# EAGLE board Programmer v0.2 (EAGLE 7.7.0)
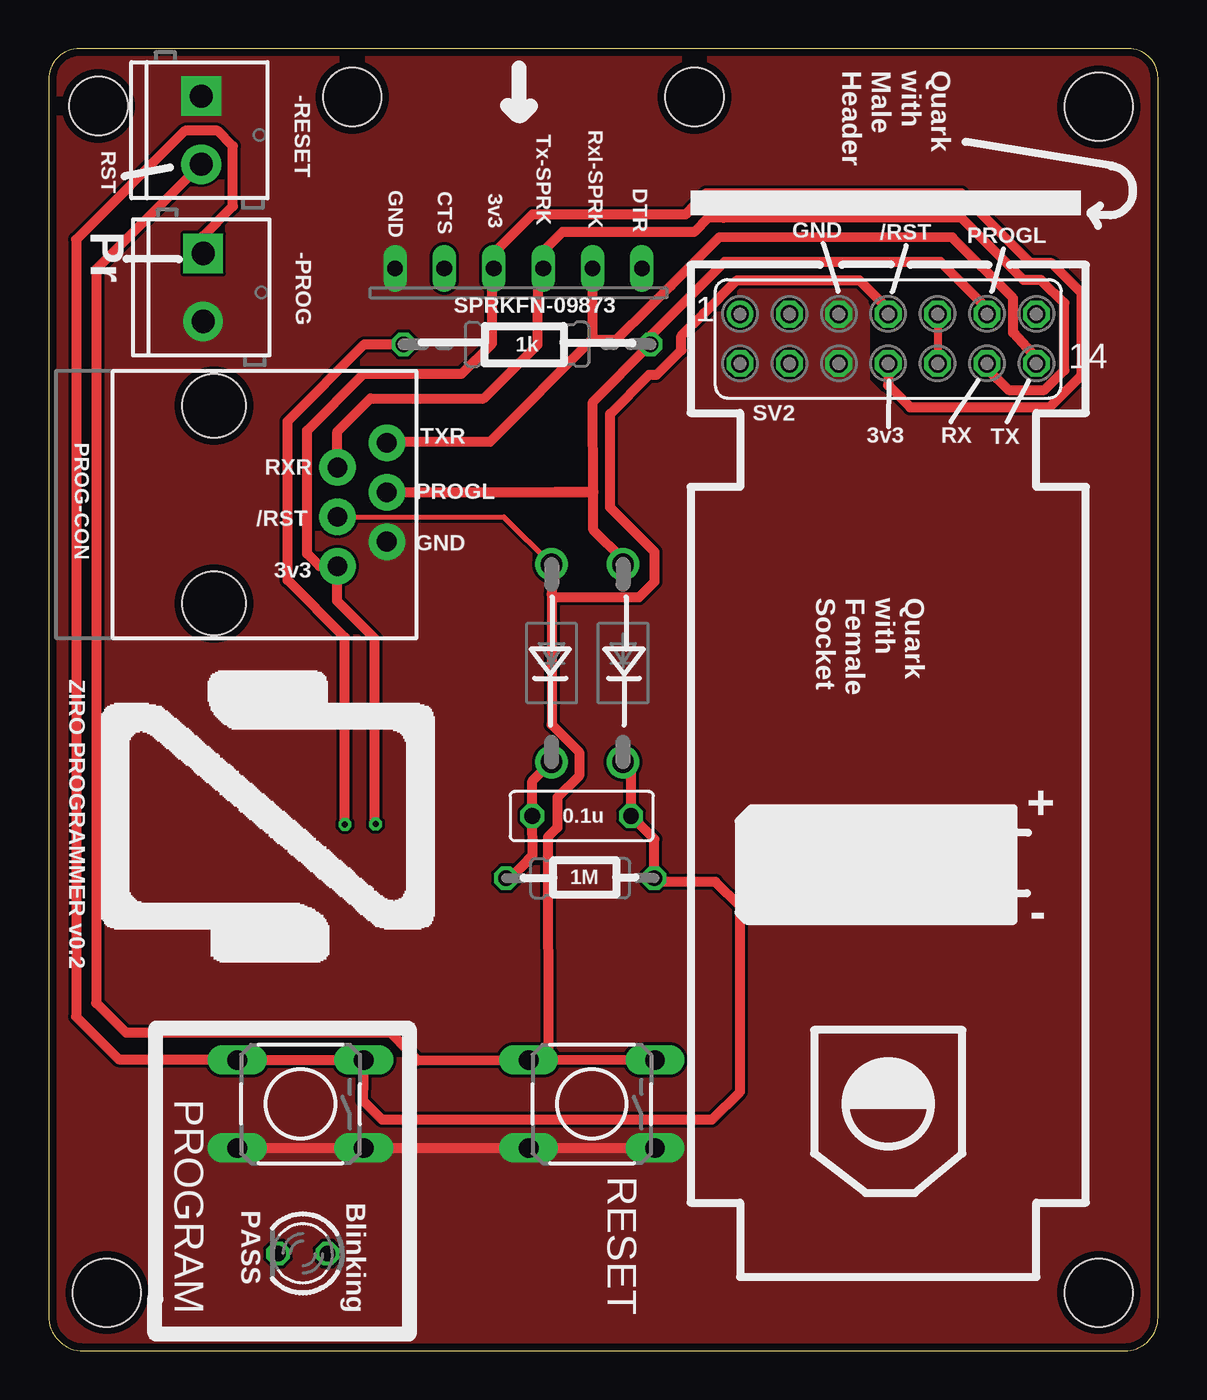
[diagram p0: board, top side]
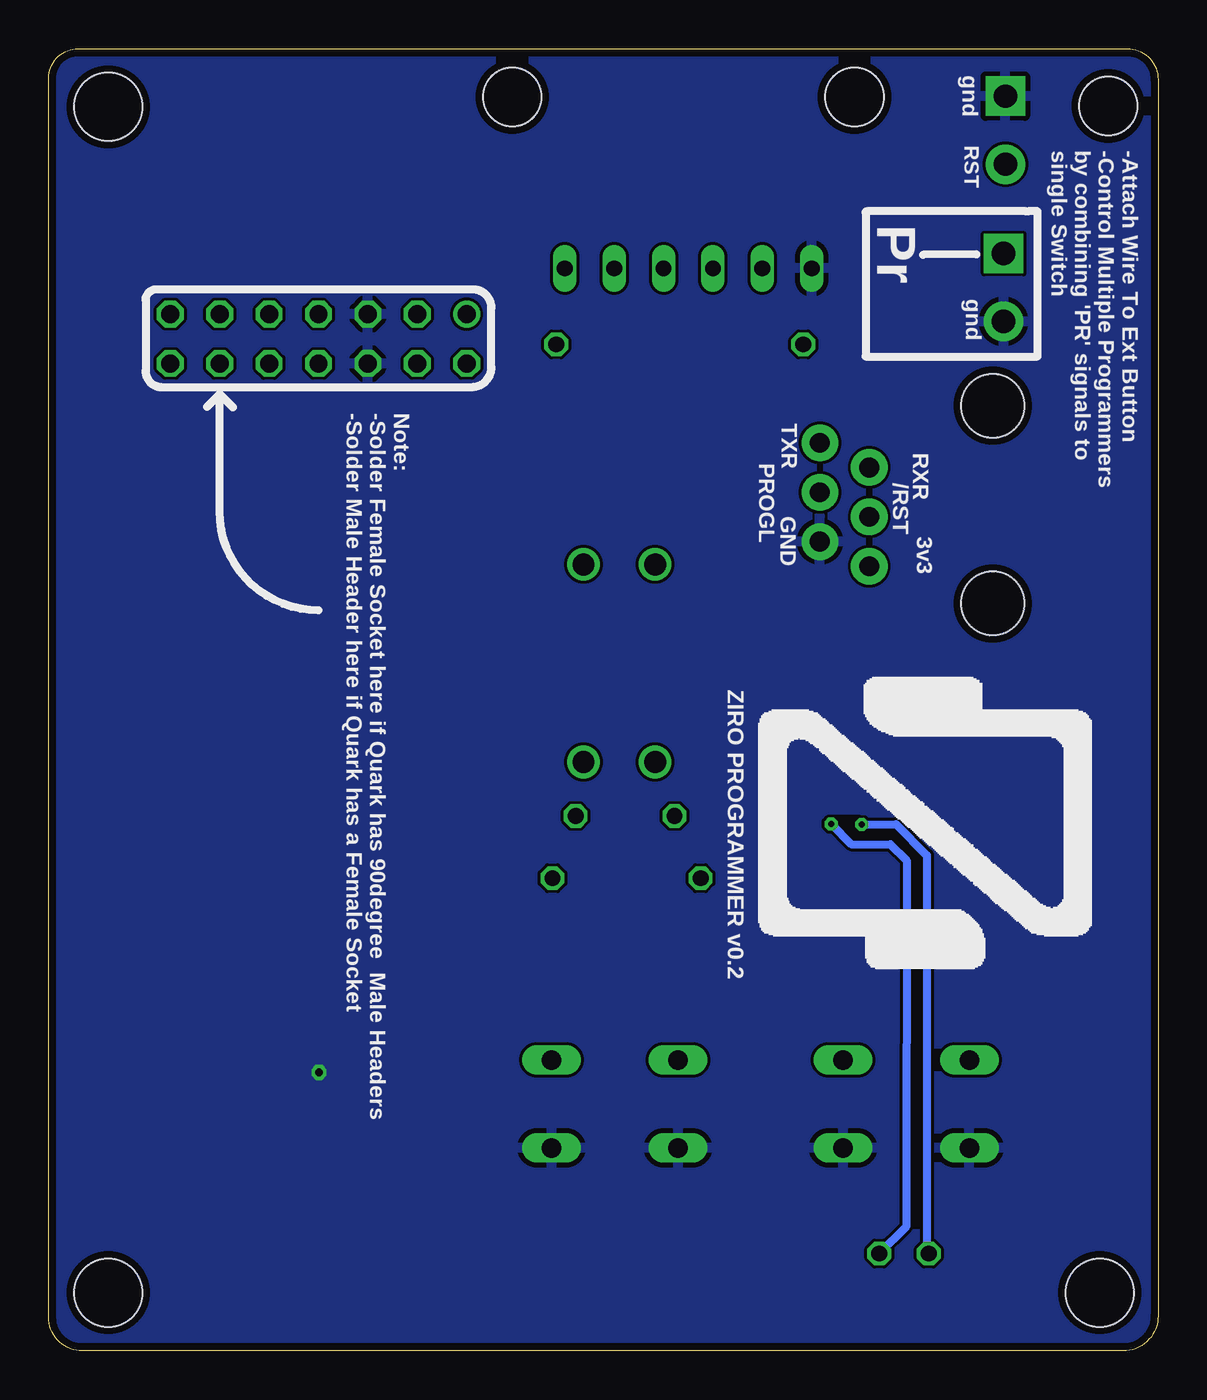
[diagram p1: board, bottom side, seen from below]

Size 57.06 x 67 mm. Coordinates in mm from the lower left corner, seen from the top.
Outline: 55.54,67 1.59,67 arc90 0,65.41 0,1.8 arc90 1.8,0 55.33,0 arc90 57.06,1.73 57.06,65.48 arc90 55.54,67
Copper layers (1*16): Top 0.0356mm / dielectric 1.5011mm / Bottom 0.0356mm
Design rules "oshpark-2layer-via-buried": minimum track width 6mil, minimum drill 10mil, track to track 6mil, track to pad 6mil, pad to pad 6mil, via to via 6mil, smd to smd 6mil, copper to edge 15mil, drill to drill 6mil, minimum pad ring 7mil, minimum via ring 7mil, stop-mask expansion 2.5mil, vias tented up to drill 16mil, thermal gap 10mil
Holes 3.5 mm at 54,3 54,64 3,3
Holes 3 mm at 15.62,64.51 33.22,64.51 2.56,64.05
tRestrict: 3 lines
bRestrict: 1 lines

## Footprints (pad centres in the part's own frame; a part is rotated, then mirrored left to right if it is on the bottom)
SCREWTERMINAL-3.5MM-2 = drill 1.2 pad 2.032 square: 1 0,0 | drill 1.2 pad 2.032: 2 3.5,0
C050-025X075 = drill 0.813 octagon: 1 -2.54,0; 2 2.54,0
DO41-10 = drill 1.118: A 5.08,0; C -5.08,0
LED3MM = drill 0.813 octagon: A -1.27,0; K 1.27,0
RJ11-6 = drill 1.016 pad 1.88: 1 -3.175,8.89; 2 -1.905,6.35; 3 -0.635,8.89; 4 0.635,6.35; 5 1.905,8.89; 6 3.175,6.35 | hole 3.251: -5.08,0; 5.08,0
TAC-SWITCH-PTH = drill 1.016 pad 1.524 long: 1 -3.251,2.261; 2 3.251,2.261; 3 -3.251,-2.261; 4 3.251,-2.261
0207/12 = drill 0.813 octagon: 1 -6.35,0; 2 6.35,0
0204/7 = drill 0.813 octagon: 1 -3.81,0; 2 3.81,0
FE06W = drill 0.813 long: 1 -6.35,0; 2 -3.81,0; 3 -1.27,0; 4 1.27,0; 5 3.81,0; 6 6.35,0
FE07-2 = drill 0.914: 1 -7.62,1.27 | drill 0.914 octagon: 2 -7.62,-1.27; 3 -5.08,1.27; 4 -5.08,-1.27; 5 -2.54,1.27; 6 -2.54,-1.27; 7 0,1.27; 8 0,-1.27; 9 2.54,1.27; 10 2.54,-1.27; 11 5.08,1.27; 12 5.08,-1.27; 13 7.62,1.27; 14 7.62,-1.27

## Placement (x,y rotation side)
-PROG  [SCREWTERMINAL-3.5MM-2]  7.95,56.46 270 top
-RESET  [SCREWTERMINAL-3.5MM-2]  7.85,64.55 270 top
C1  0.1uF  [C050-025X075]  27.42,27.52 0 top
D1  1N4004  [DO41-10]  25.87,35.38 90 top
D2  1N4004  [DO41-10]  29.55,35.38 90 top
LED1  TLLG4400  [LED3MM]  13.07,5.01 180 top
PROG-CON  RJ11  [RJ11-6]  8.51,43.54 270 top
PROGRAM  [TAC-SWITCH-PTH]  12.95,12.7 180 top
R1  1k  [0207/12]  24.6,51.78 180 top
R2  1M  [0204/7]  27.34,24.32 0 top
RESET  [TAC-SWITCH-PTH]  27.94,12.7 180 top
SPRKFN-09873  [FE06W]  24.16,55.69 180 top
SV2  [FE07-2]  43.18,52.07 0 top

## Library data of the parts
-PROG -RESET = SparkFun-Connectors; PROD_ID: CONN-08399
C1 R1 = rcl
D1 D2 = diode
LED1 = led; MF: VISHAY SEMICONDUCTOR; OC_FARNELL: 1612435
PROG-CON = SparkFun-Connectors; PROD_ID: CONN-08590
PROGRAM RESET = GeekAmmo
R2 = eagle-ltspice; SPICEMODEL: NONE; SPICEPREFIX: R
SPRKFN-09873 SV2 = con-lsta; OC_FARNELL: unknown; OC_NEWARK: unknown

## Nets
3.3V: LED1.A PROG-CON.6 SPRKFN-09873.4 SV2.8
/RST: -RESET.2 D1.A PROG-CON.4 RESET.3 RESET.4 SV2.7
CTS: SPRKFN-09873.5
DTR: SPRKFN-09873.1
GND: -PROG.2 -RESET.1 PROG-CON.5 PROGRAM.1 PROGRAM.2 RESET.1 RESET.2 SPRKFN-09873.6 SV2.5 SV2.6
GPIO0: D2.A PROG-CON.3 R1.1 SV2.11
N$2: LED1.K R1.2
N$7: C1.1 D1.C R2.1
PROG: -PROG.1 C1.2 D2.C PROGRAM.3 PROGRAM.4 R2.2
RXR: PROG-CON.2 SPRKFN-09873.3 SV2.12
TXR: PROG-CON.1 SPRKFN-09873.2 SV2.14
VDD: SV2.9 SV2.10

## Tracks (layer width: path | path; a pad name or v marks a point on that pad's centre or on a via)
3.3V  (via drill 0.3)
  Top 0.406: v16.82,27.1 16.82,27.23 16.76,27.23
  Top 0.508: SV2.8 43.18,49.68 44.31,48.55 51.48,48.55 53.13,50.2 53.12,54.43 51.59,55.96 50.52,55.96 46.94,59.54 33.8,59.54 32.76,58.46 24.88,58.46 22.89,56.47 SPRKFN-09873.4 22.81,56.18 22.81,51.83 21.25,50.27 16.2,50.27 13.29,47.35 13.29,41.01 13.94,40.37 PROG-CON.6 14.83,40.34 14.83,38.58 16.77,36.64 16.76,27.23 v16.82,27.1
  Bottom 0.406: LED1.A 12.93,6.42 12.9,25.2 13.77,26.06 15.77,26.06 v16.82,27.1
/RST
  Top 0.254: PROG-CON.4 23.42,42.91 D1.A
  Top 0.508: 25.87,38.94 D1.A 25.84,40.15 25.93,40.21 | 25.87,38.94 25.87,32.22 27.28,30.81 27.28,29.59 26.16,28.47 26.16,26.92 25.68,26.44 25.7,14.9 | 25.7,14.9 RESET.4 18.98,14.94 18.47,15.45 17.56,16.38 3.97,16.38 2.45,17.9 2.45,55.65 -RESET.2 | RESET.3 25.54,14.96 25.7,14.9 | SV2.7 43.26,53.42 43.26,53.52 41.7,55.08 35.39,55.08 33.68,53.37 32.54,52.22 32.54,51.48 31.27,50.22 30.89,50.22 28.88,48.2 28.88,43.4 31.17,41.1 31.17,39.57 30.36,38.76 26.04,38.76 25.87,38.94
GND  (via drill 0.41)
  Top 0.508: PROGRAM.2 PROGRAM.1 RESET.2 RESET.1
  other vias: 43.15,14.33
  pour Top (no thermals): -8.89,76.2 -12.7,76.2 -12.7,-5.08 78.74,-5.08 78.74,76.2
  pour Bottom: -36.83,80.01 82.55,80.01 82.55,-13.97 -36.83,-13.97 -36.86,78.77
GPIO0
  Top 0.406: D2.A 29.55,40.71 | 23.18,44.17 22.99,44.18
  Top 0.508: SV2.11 48.26,53.63 45.87,56.02 34.76,56.02 30.96,52.23 30.96,51.8 R1.1 | PROG-CON.3 22.99,44.18 28.02,44.18 | 28.02,44.2 27.99,48.82 R1.1 | 30.89,51.67 R1.1 | 29.55,40.71 28.02,42.24 28.02,44.18 | 28.02,44.18 28.02,44.2 | 28.02,44.2 26.06,44.2 26.04,44.17 23.18,44.17
N$2  (via drill 0.3)
  Top 0.508: v15.24,27.09 15.24,36.7 12.3,39.65 12.29,47.83 16.24,51.79 R1.2
  Bottom 0.406: v15.24,27.09 13.47,27.09 11.89,25.5 11.89,5.1 LED1.K
N$7
  Top 0.508: R2.1 23.75,24.33 24.89,25.51 C1.1 24.88,29.31 D1.C
PROG
  Top 0.508: D2.C 29.96,29.89 C1.2 31.15,26.33 R2.2 31.34,24.13 34.29,24.13 35.56,22.86 35.56,13.33 34.13,11.9 30.62,11.91 17.14,11.91 16.16,12.9 PROGRAM.3 PROGRAM.4 9.62,15.01 3.6,15.01 1.42,17.19 1.42,57.17 7.01,62.76 8.7,62.76 9.48,61.98 9.48,58.88 7.95,57.35 -PROG.1
RXR
  Top 0.508: SV2.12 48.26,50.55 49.38,49.43 51.22,49.43 52.24,50.46 52.24,53.91 51.13,54.99 51.03,55.09 50.14,55.09 46.97,58.27 34.7,58.3 33.93,58.3 33.2,57.56 26.42,57.56 25.45,56.59 SPRKFN-09873.3 25.17,56.26 25.15,51.77 22.37,49 16.55,49 14.86,47.3 PROG-CON.2
TXR
  Top 0.508: SPRKFN-09873.2 27.95,56.46 | 27.95,56.46 27.95,52.04 | 27.95,52.04 27.95,52 29.17,52 30.9,53.7 32,54.8 34.5,57.3 46.48,57.28 49.61,54.16 49.61,52.38 51.05,50.8 SV2.14 | 27.95,52.04 22.69,46.76 17.44,46.76 PROG-CON.1 | 28.09,56.48 27.85,55.96 27.95,56.46
VDD
  Top 0.406: SV2.9 SV2.10

## Text on the board
Bottom: Dhrona
tPlace: RST | Pr | 1k | 0.1u | + | 1M | -
bPlace: gnd | -Attach Wire To Ext Button / -Control Multiple Programmers / by combining 'PR' signals to / single Switch | RST | Pr | gnd | Note: / -Solder Female Socket here if Quark has 90degree Male Headers / -Solder Male Header here if Quark has a Female Socket
tNames: Quark / with / Male / Header | Tx-SPRK | RxI-SPRK | GND | CTS | 3v3 | DTR | GND | /RST | PROGL | TXR | 3v3 | RX | TX | RXR | PROGL | /RST | GND | 3v3 | Quark / with / Female / Socket | ZIRO PROGRAMMER v0.2 | Blinking / / / / PASS
bNames: TXR | RXR | PROGL | /RST | GND | 3v3 | ZIRO PROGRAMMER v0.2